# Altium PCB Glucometer-I.C.- Mis 1.PcbDoc
Units mm, origin at the board's own origin, x right, y up, seen from the top; angles counter-clockwise.
Board outline 152.4 x 101.6 mm, 2 copper layers (Top Layer, Bottom Layer); 2 components, 4 nets, 8 pads, 0 vias.
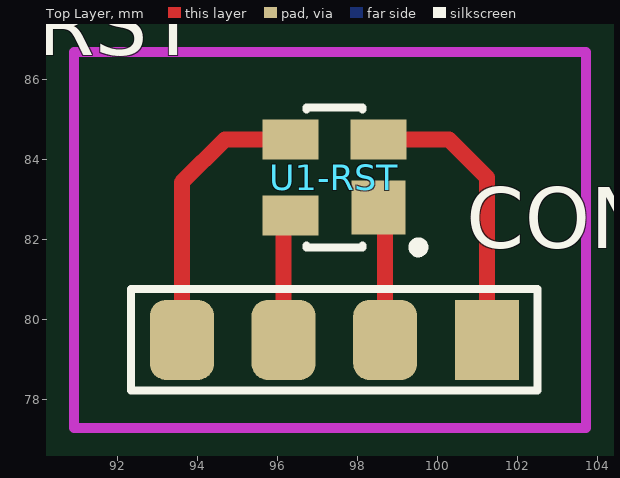
[diagram p0: Top Layer view]
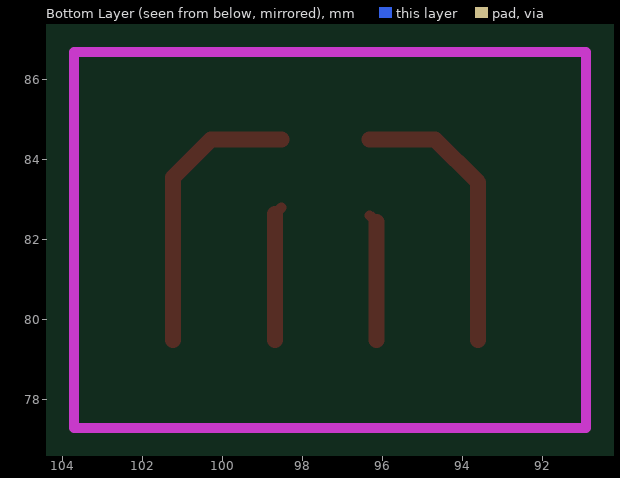
[diagram p1: Bottom Layer view, seen from below]

## Layer stack, top to bottom
Top Layer: signal copper 0.0356
Dielectric: dielectric 0.32, FR-4, Dk 4.8
Bottom Layer: signal copper 0.0356

## Board outline
25.4,25.4 177.8,25.4 177.8,127 25.4,127

## Design rules (kind name [scope] priority, off if disabled: settings)
Clearance [All] p1: gap=0.3
PolygonConnect [All] p1: connectstyle=Relief reliefconductorwidth=0.254 reliefentries=4 polygonreliefangle="90 Angle" airgapwidth=0.254
RoutingVias [All] p1: holewidth=0.711 width=1.27 viastyle="Through Hole" minholewidth=0.711 minwidth=1.27 maxholewidth=0.711 maxwidth=1.27
SolderMaskExpansion [All] p1: expansion=0.102
Width [All] p1: maxlimit=5 minlimit=0.25 preferedwidth=0.4 minimp=50.000000 maximp=50.000000 favimp=50.000000
28 further rules are at their usual default settings.

## Components (designator, comment, footprint, x,y, rotation, side; value= is the part's Value field where it differs from the comment)
CON1-RST "Header 4" HDR1X4 101.219,79.502 r180 top
U1-RST "SMT811TW16F" SOT143 97.409,83.566 r90 top

## Footprints (in the part's own frame and the unit in brackets; to place one, negate y for a bottom-side part, rotate by r counter-clockwise, add the part's x,y. Pads: shape width x height; smd on the part's side, far side on the other; paste and mask are expansions set on the pad)
HDR1X4 [mm] "Connector; Header; 4 Position"
  rect 1.6x2 smd: 1(0,0)
  rrect50% 1.6x2 smd: 2(2.54,0) 3(5.08,0) 4(7.62,0)
  silkscreen extent -1.27,-1.27 8.89,1.27
SOT143 [mm] "SOT-143; 4 Leads; Body 3 x 2.6 mm, inc. leads (LxW max)"
  rect 1.35x1.35 smd: 1(-0.75,-1.1)
  rect 1x1.4 smd: 2(0.95,-1.1) 3(0.95,1.1) 4(-0.95,1.1)
  silkscreen extent -1.87,-2.23 1.75,0.7

## Part data
CON1-RST: "Header, 4-Pin"
U1-RST: "Reset Circuit, 3.08V, Push Pull Inverted RST"

## Nets (pads, with @x,y where several pads share a name; then routed paths per layer and width w, separated by ;. In a path a pad name is that pad's centre, name@x,y a point inside that pad or via, vN(x,y) a via of type N, cw(c..) or ccw(c..) an arc to the next point about the centre after c; other vN are vias at no path point)
NetCON1-RST_1: CON1-RST.1 U1-RST.2 | length 7.2
  Top Layer w0.4: U1-RST.2 100.269,84.516 101.219,83.566 CON1-RST.1
NetCON1-RST_2: CON1-RST.2 U1-RST.1 | length 3.4
  Top Layer w0.254: U1-RST.1 U1-RST.1@98.679,82.646
  Top Layer w0.4: CON1-RST.2 U1-RST.1@98.679,82.646
NetCON1-RST_3: CON1-RST.3 U1-RST.4 | length 3.2
  Top Layer w0.254: U1-RST.4@96.139,82.446 U1-RST.4
  Top Layer w0.4: CON1-RST.3 U1-RST.4@96.139,82.446
NetCON1-RST_4: CON1-RST.4 U1-RST.3 | length 7.1
  Top Layer w0.4: CON1-RST.4 93.599,83.439 94.676,84.516 U1-RST.3

## Keep-outs
Keep-Out Layer:
  lines w0.254: 90.9,77.3 103.7,77.3 103.7,86.7 90.9,86.7 90.9,77.3